# Altium PCB 2015-08-14_11-36-19.PcbDoc
Units mil, origin at the board's own origin, x right, y up, seen from the top; angles counter-clockwise.
Board outline 3100 x 2300 mil, 4 copper layers (Top Layer, MidLayer1, MidLayer2, Bottom Layer); 26 components, 13 nets, 66 pads, 301 vias.
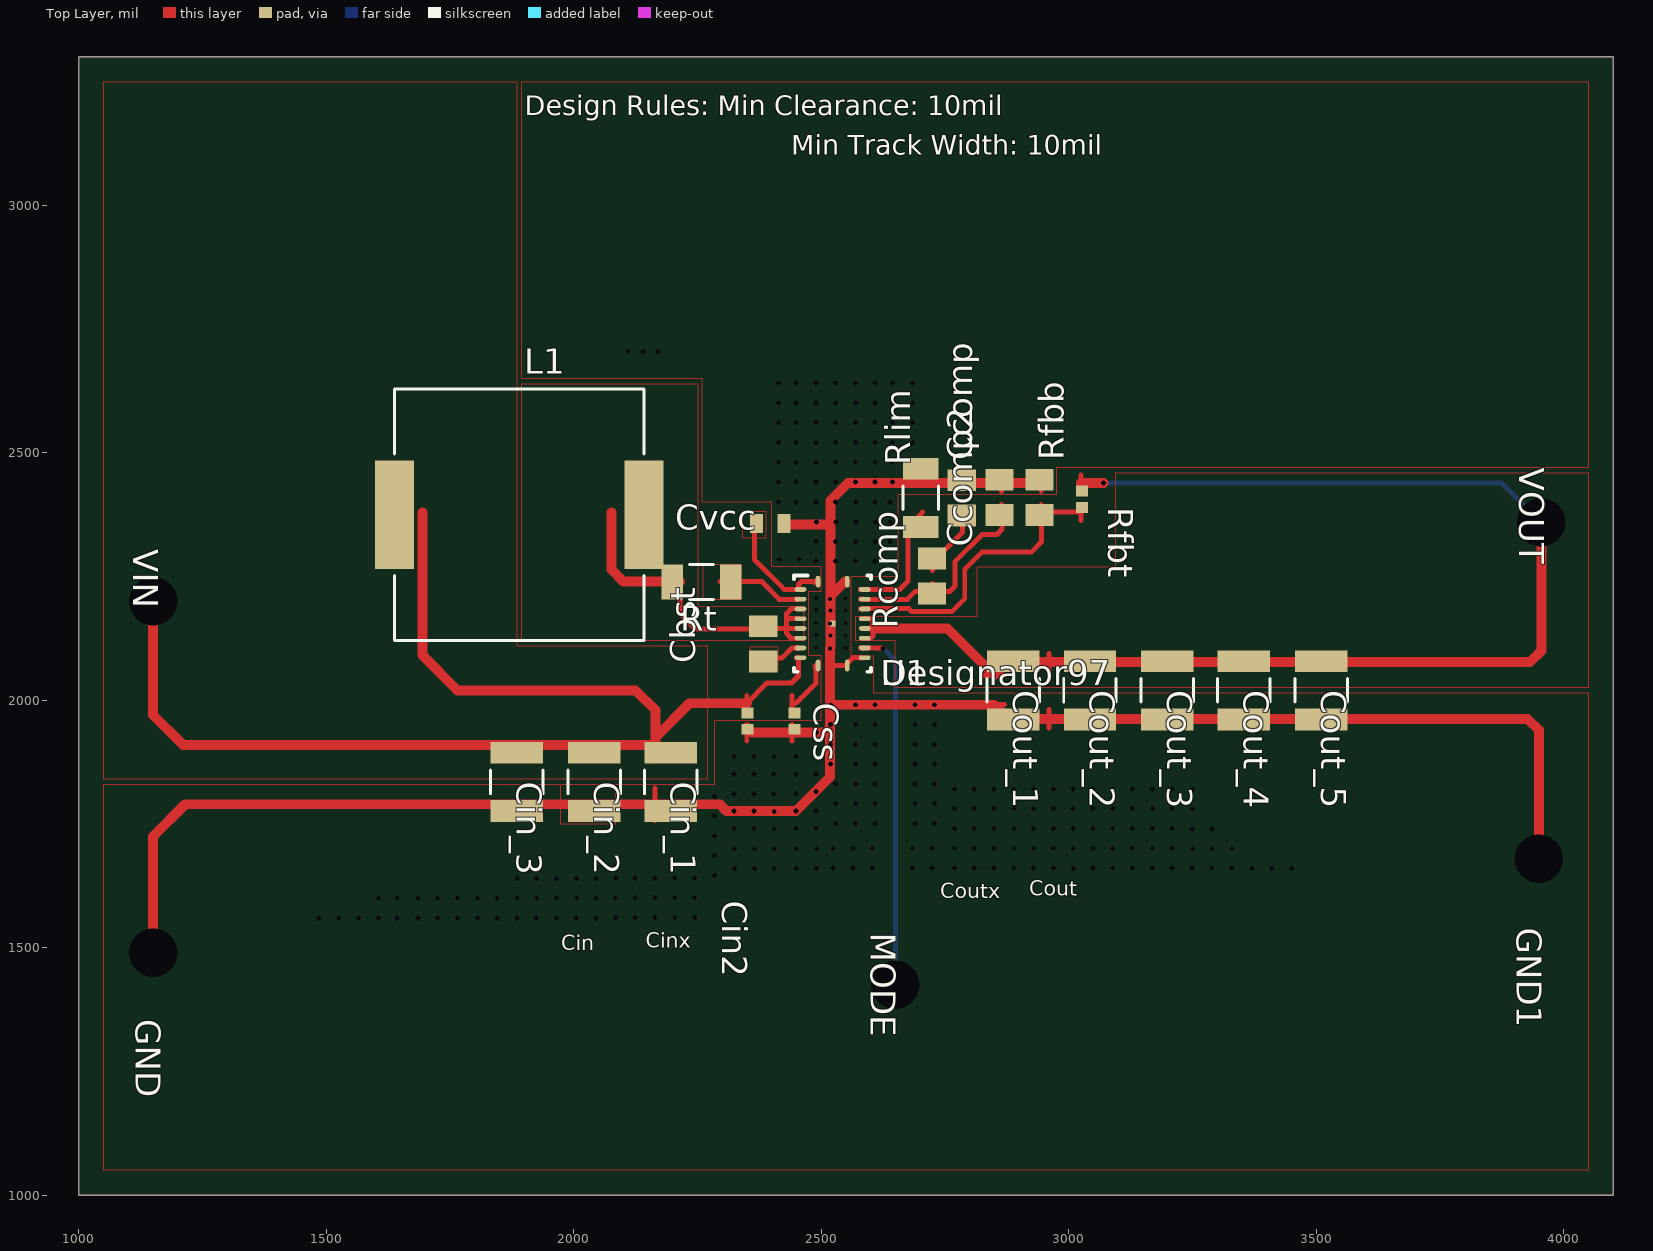
[diagram p0: Top Layer view]
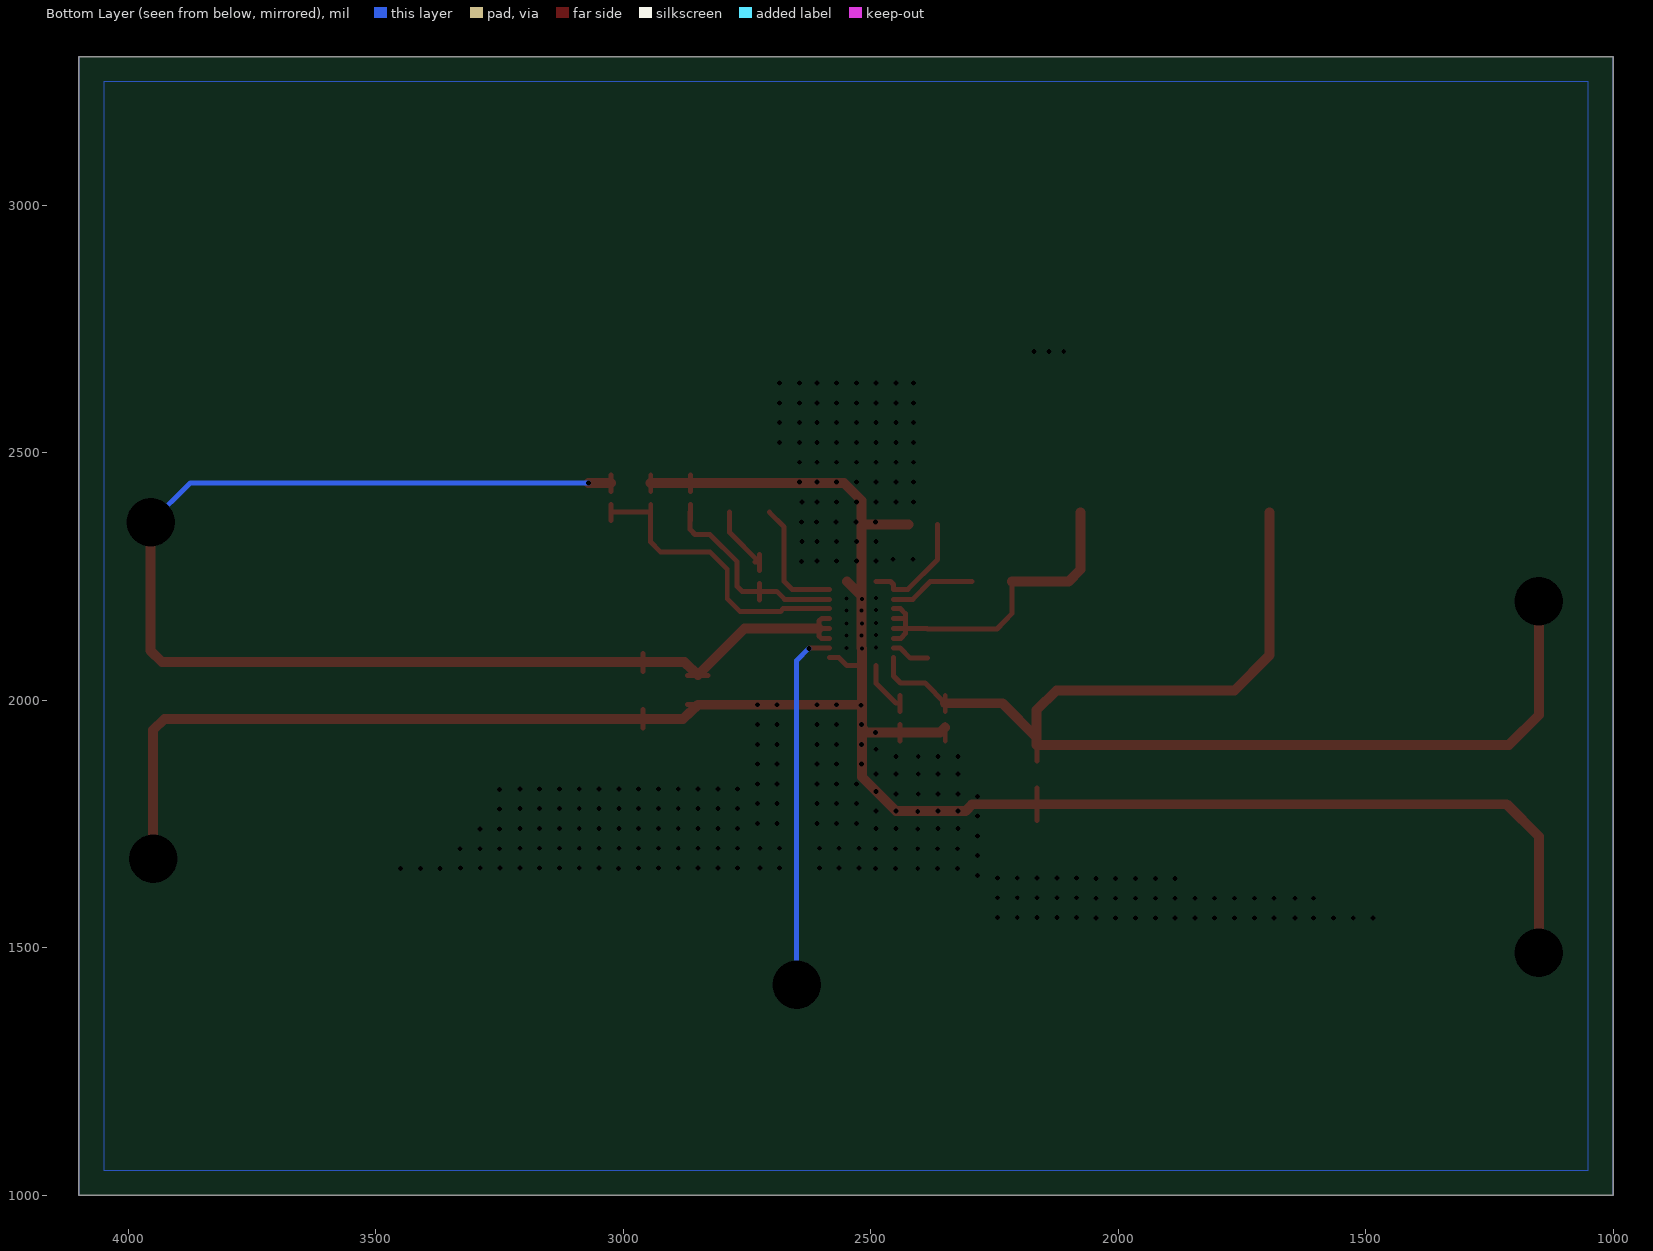
[diagram p1: Bottom Layer view, seen from below]

## Layer stack, top to bottom
Top Layer: signal copper 1.4
Dielectric: core 12.6, FR-4, Dk 4.8
MidLayer1: signal copper 1.4
Dielectric: prepreg 12.6, FR-4, Dk 4.8
MidLayer2: signal copper 1.4
Dielectric: core 12.6, FR-4, Dk 4.8
Bottom Layer: signal copper 1.4

## Board outline
1000,1000 4100,1000 4100,3300 1000,3300

## Design rules (kind name [scope] priority, off if disabled: settings)
PlaneConnect [All] p0: scope1count=1 scope1_0_kind=Board scope1_0_value=Board scope2count=1 scope2_0_kind=Board scope2_0_value=Board commentlength=0 planeconnectstyle=Direct reliefexpansion=20 reliefentries=4 reliefconductorwidth=10 reliefairgap=10
PlaneConnect [All] p1: planeconnectstyle=Direct reliefexpansion=20 reliefentries=4 reliefconductorwidth=10 reliefairgap=10
PolygonConnect [All] p0: scope1count=1 scope1_0_kind=Board scope1_0_value=Board scope2count=1 scope2_0_kind=Board scope2_0_value=Board commentlength=0 connectstyle=Direct reliefconductorwidth=10 reliefentries=4 polygonreliefangle="90 Angle"
PolygonConnect [All] p1: connectstyle=Direct reliefconductorwidth=10 reliefentries=4 polygonreliefangle="90 Angle"

## Components (designator, comment, footprint, x,y, rotation, side; value= is the part's Value field where it differs from the comment)
Cbst "" 0805 2383,2114 r90 top
Ccomp "" 0805 2784,2409 r90 top
Ccomp2 "" 0805 2860,2410 r90 top
Cin2 "" 0402 2351,1958 r270 top
Cin_1 "" 1210 2196,1835 r270 top
Cin_2 "" 1210 2041,1835 r270 top
Cin_3 "" 1210 1885,1835 r270 top
Cout_1 "" 1210 2888,2020 r270 top
Cout_2 "" 1210 3043,2020 r270 top
Cout_3 "" 1210 3199,2020 r270 top
Cout_4 "" 1210 3354,2020 r270 top
Cout_5 "" 1210 3510,2020 r270 top
Css "" 0402 2446,1958 r270 top
Cvcc "" 1608 2397,2357 r0 top
GND "" TP-1502 1149,1490 r270 top
GND1 "" TP-1502 3948,1679 r270 top
L1 "" ETQP 1890,2375 r0 top
MODE "" TP-1502 2649,1425 r270 top
Rcomp "" 0805 2724,2251 r90 top
Rfbb "" 0805 2941,2410 r90 top
Rfbt "" 0402 3027,2406 r270 top
Rlim "" 1206 2701,2409 r90 top
Rt "" 1206 2258,2239 r0 top
U1 "" RHL0020A 2523,2155 r0 top
VIN "" TP-1502 1149,2198 r270 top
VOUT "" TP-1502 3953,2358 r270 top

## Footprints (in the part's own frame and the unit in brackets; to place one, negate y for a bottom-side part, rotate by r counter-clockwise, add the part's x,y. Pads: shape width x height; smd on the part's side, far side on the other; paste and mask are expansions set on the pad)
0402 [mil]
  rect 22x24 smd: 1(-16.5,0) 2(16.5,0)
0805 [mil]
  rect 44x57 smd: 1(-35.5,0) 2(35.5,0)
1206 [mil]
  rect 44x71 smd: 1(-59,0) 2(59,0)
  silkscreen extent -24,-36 24,36
1210 [mil]
  rect 44x106 smd: 1(-59,0) 2(59,0)
  silkscreen extent -24,-53 24,53
1608 [mil]
  rect 26x38 smd: 1(-27.5,0) 2(27.5,0)
ETQP [mil]
  rect 79x220 smd: 1(-252,0) 2(252,0)
  silkscreen extent -252,-254 252,254
RHL0020A [mm]
  oval 0.24x0.6 smd: 1(-0.75,2.15) 10(-0.75,-2.15) 11(0.75,-2.15) 20(0.75,2.15)
  oval 0.6x0.24 smd: 2(-1.65,1.75) 3(-1.65,1.25) 4(-1.65,0.75) 5(-1.65,0.25) 6(-1.65,-0.25) 7(-1.65,-0.75) 8(-1.65,-1.25) 9(-1.65,-1.75) 12(1.65,-1.75) 13(1.65,-1.25) 14(1.65,-0.75) 15(1.65,-0.25) 16(1.65,0.25) 17(1.65,0.75) 18(1.65,1.25) 19(1.65,1.75)
  rect 0.3x0.3 smd: 21(0,0)
  silkscreen extent -1.98,-2.47 1.98,2.47
TP-1502 [mil]
  round 0 hole 32: 1(0,0)

## Via types
v1: diameter 0, hole 10, Top Layer to Bottom Layer, 281 vias
v2: diameter 0, hole 8, Top Layer to Bottom Layer, 15 vias
v3: diameter 0, hole 98, Top Layer to Bottom Layer, 5 vias

## Nets (pads, with @x,y where several pads share a name; then routed paths per layer and width w, separated by ;. In a path a pad name is that pad's centre, name@x,y a point inside that pad or via, vN(x,y) a via of type N, cw(c..) or ccw(c..) an arc to the next point about the centre after c; other vN are vias at no path point)
0: Ccomp2.2 Ccomp.2 Cin2.2 Cin_1.2 Cin_2.2 Cin_3.2 Cout_1.2 Cout_2.2 Cout_3.2 Cout_4.2 Cout_5.2 Css.2 Cvcc.2 GND1.1 GND.1 Rfbb.2 Rlim.2 U1.11 U1.12 U1.20 U1.21 | length 5042.3
  Top Layer w10: Cin_1.2@2164,1757 2164,1823 ; 2349.5,1918 Cin2.2@2349.5,1951 ; 2440.5,1918 Css.2@2440.5,1951 ; 2518,2070 2519,2070 2548,2070 2564,2086 U1.12@2583,2086 ; U1.21@2518.5,2153 U1.21@2518.5,2156 ; 2829,1991.5 2870,1991.5 ; 2864.5,2422 Ccomp2.2@2864.5,2455 ; 2944.5,2422 Rfbb.2@2944.5,2455 ; 2960,1944 2960,1981
  Top Layer w20: v3(1150,1490) 1150,1725 1215,1790 2030,1790 2165,1790 2295,1790 2308,1776 v1(2324,1776) v1(2364,1776) v1(2449,1776) 2518,1845 2518,1945 ; Cin2.2@2350,1945 2360,1935 2441,1935 2509,1935 2518,1945 ; Cvcc.2@2424,2355 2519,2355 ; U1.20@2548,2240 2519,2211 ; Rfbb.2@2945,2439 2865,2439 2785,2439 2705,2439 2554,2439 2519,2404 2519,2355 ; v3(3950,1680) 3950,1940 3927,1962 2960,1962 2879,1962 2849,1991 2521,1991 2518,1995 ; 2518,1945 2518,1995 ; 2518,1995 2518,2070 v2(2518,2105) 2519,2106 v2(2519,2131) v2(2519,2181) 2519,2211 ; 2519,2211 2519,2355
  other v1: 1485,1560 1525,1560 1565,1560 1605,1560 1643,1560 1685,1560 1725,1560 1765,1560 1805,1560 1845,1560 1885,1560 1925,1560 1965,1560 2005,1560 2045,1560 2084,1561 2124,1561 2164,1561 2204,1561 2244,1561 1605,1600 1643,1600 1685,1600 1725,1600 1765,1600 1805,1600 1845,1600 1885,1600 1925,1600 1965,1600 2005,1600 2045,1600 2084,1601 2124,1601 2164,1601 2204,1601 2244,1601 1885,1640 1925,1640 1965,1640 2005,1640 2045,1640 2084,1641 2124,1641 2164,1641 2204,1641 2244,1641 2284,1646 2325,1660 2365,1660 2405,1660 2450,1660 2490,1660 3010,1660 3370,1660 3410,1660 3450,1660 2524,1661 2564,1661 2604,1661 2684,1661 2724,1661 2769,1661 2809,1661 2849,1661 2889,1661 2929,1661 2969,1661 3049,1661 3089,1661 3129,1661 3169,1661 3209,1661 3249,1661 3289,1661 3329,1661 2284,1686 2325,1700 2365,1700 2405,1700 2450,1700 2490,1700 3250,1700 3290,1700 3330,1700 2524,1701 2564,1701 2604,1701 2684,1701 2724,1701 2769,1701 2809,1701 2849,1701 2889,1701 2929,1701 2969,1701 3009,1701 3049,1701 3089,1701 3129,1701 3169,1701 3209,1701 2284,1726 2405,1740 3250,1740 3290,1740 2324,1741 2364,1741 2449,1741 2489,1741 2769,1741 2809,1741 2849,1741 2889,1741 2929,1741 2969,1741 3009,1741 3049,1741 3089,1741 3129,1741 3169,1741 3209,1741 2529,1751 2569,1751 2609,1751 2689,1751 2729,1751 2284,1766 2405,1775 2489,1776 3250,1780 2769,1781 2809,1781 2849,1781 2889,1781 2929,1781 2969,1781 3009,1781 3049,1781 3089,1781 3129,1781 3169,1781 3209,1781 2529,1791 2569,1791 2609,1791 2689,1791 2729,1791 2284,1806 2324,1811 2364,1811 2404,1811 2449,1811 2489,1816 3250,1820 2769,1821 2809,1821 2849,1821 2889,1821 2929,1821 2969,1821 3009,1821 3049,1821 3089,1821 3129,1821 3169,1821 3209,1821 2529,1831 2569,1831 2609,1831 2689,1831 2729,1831 2324,1851 2364,1851 2404,1851 2449,1851 2489,1851 2519,1871 2569,1871 2609,1871 2689,1871 2729,1871 2324,1886 2364,1886 2404,1886 2449,1886 2489,1901 2519,1911 2569,1911 2609,1911 2689,1911 2729,1911 2490,1935 2519,1951 2569,1951 2609,1951 2689,1951 2729,1951 2520,1990 2569,1991 2609,1991 2689,1991 2729,1991 2640,2280 2489,2281 2529,2281 2569,2281 2609,2281 2415,2285 2455,2285 2489,2321 2529,2321 2569,2321 2609,2321 2639,2321 2490,2360 2530,2360 2570,2360 2610,2360 2640,2360 2414,2401 2449,2401 2489,2401 2529,2401 2569,2401 2609,2401 2639,2401 2414,2441 2449,2441 2489,2441 2529,2441 2569,2441 2609,2441 2644,2441 2414,2481 2449,2481 2489,2481 2529,2481 2569,2481 2609,2481 2644,2481 2414,2521 2449,2521 2489,2521 2529,2521 2569,2521 2609,2521 2644,2521 2684,2521 2414,2561 2449,2561 2489,2561 2529,2561 2569,2561 2609,2561 2644,2561 2684,2561 2414,2601 2449,2601 2489,2601 2529,2601 2569,2601 2609,2601 2644,2601 2684,2601 2414,2641 2449,2641 2489,2641 2529,2641 2569,2641 2609,2641 2644,2641 2684,2641 2110,2705 2140,2705 2170,2705
  other v2: 2549,2106 2489,2107 2549,2131 2489,2132 2518,2155 2549,2155 2489,2156 2549,2181 2489,2182 2518,2205 2549,2206 2489,2207
1: Cin2.1 Cin_1.1 Cin_2.1 Cin_3.1 L1.1 U1.9 VIN.1 | length 2637.5
  Top Layer w10: Cin_1.1@2164,1877 2164,1943 ; Cin2.1@2349.5,1977 2349.5,2010 ; 2350,1994 2390,2035 2440,2035 2454,2049 U1.9@2454,2086
  Top Layer w20: v3(1150,2200) 1150,1970 1210,1910 Cin_1.1@2165,1910 ; 1694,2380 1694,2091 1765,2020 2125,2020 2165,1980 Cin_1.1@2165,1910 ; 2350,1994 2234,1994 2165,1925 Cin_1.1@2165,1910
2: Cvcc.1 U1.1 U1.2 | length 232.3
  Top Layer w10: Cvcc.1@2365,2355 2365,2284 2425,2224 2454,2224 2454,2234 2460,2240 U1.1@2489,2240
3: Ccomp2.1 Rcomp.1 U1.18 | length 470.7
  Top Layer w10: U1.18@2583,2204 2674,2204 2690,2220 2725,2220 2760,2220 2770,2230 2770,2280 2825,2335 2855,2335 2865,2345 Ccomp2.1@2865,2380 ; Rcomp.1@2724.5,2203 Rcomp.1@2724.5,2236 ; Ccomp2.1@2864.5,2363 Ccomp2.1@2864.5,2396
5: Ccomp.1 Rcomp.2 | length 167.9
  Top Layer w10: 2724.5,2262 Rcomp.2@2724.5,2295 ; Rcomp.2@2734,2279 2725,2279 2785,2339 Ccomp.1@2785,2380
7: Rfbb.1 Rfbt.2 U1.17 | length 664.4
  Top Layer w10: U1.17@2583,2185 2677,2185 2682,2179 2764,2179 2790,2205 2790,2265 2825,2300 2925,2300 2945,2320 2945,2380 Rfbt.2@3025,2380 ; Rfbb.1@2944.5,2363 Rfbb.1@2944.5,2396 ; 3024.5,2363 Rfbt.2@3024.5,2396
8: Cout_1.1 Cout_2.1 Cout_3.1 Cout_4.1 Cout_5.1 Rfbt.1 U1.14 U1.15 U1.16 VOUT.1 | length 2842.3
  Top Layer w10: U1.14@2583,2125 2600,2125 2605,2130 2605,2145 ; U1.15@2583,2145 2605,2145 ; U1.16@2583,2165 2599,2165 2605,2160 2605,2145 ; 2829,2050.5 2870,2050.5 ; 2960,2058 2960,2095 ; Rfbt.1@3024.5,2422 3024.5,2455
  Top Layer w20: 2605,2145 2755,2145 2849,2051 2876,2077 2960,2077 3932,2077 3955,2100 v3(3955,2360) ; 3025,2439 v1(3070,2439)
  Bottom Layer w10: v1(3070,2439) 3875,2439 v3(3955,2360)
9: Cbst.2 L1.2 Rt.1 U1.4 U1.5 U1.6 U1.7 | length 703.1
  Top Layer w10: Rt.1@2215,2240 2215,2175 2245,2144 2385,2144 2386,2145 2430,2145 ; U1.7@2454,2125 2439,2125 2430,2135 2430,2145 ; U1.6@2454,2145 2430,2145 ; U1.5@2454,2165 2430,2165 ; U1.4@2454,2185 2440,2185 2430,2175 2430,2165 ; 2430,2145 2430,2165
  Top Layer w20: 2076,2380 2076,2264 2100,2240 Rt.1@2215,2240
11: Rlim.1 U1.19 | length 251.1
  Top Layer w10: U1.19@2583,2224 2659,2224 2675,2240 2675,2350 2705,2380
14: Css.1 U1.10 | length 133.6
  Top Layer w10: Css.1@2440.5,1977 2440.5,2010 ; 2441,1994 2449,1994 2489,2034 U1.10@2489,2070
15: Cbst.1 U1.8 | length 77.7
  Top Layer w10: Cbst.1@2385,2085 2420,2085 2441,2106 U1.8@2454,2106
16: Rt.2 U1.3 | length 174.2
  Top Layer w10: Rt.2@2295,2240 2380,2240 2415,2204 U1.3@2454,2204
22: MODE.1 U1.13 | length 732.6
  Top Layer w10: U1.13@2583,2106 2623,2106 v1(2625,2105)
  Bottom Layer w10: v1(2625,2105) 2650,2080 v3(2650,1425)

## Polygon pours and split planes (outlines as drawn)
2 on Top Layer " " (solid, pour order 0): 2341,2327 2341,2382 2388,2382 2388,2327
2 on Top Layer " " (solid, pour order 1): 2484,2232 2484,2242 2493,2242 2493,2232
11 on Top Layer " " (solid, pour order 2): 2576,2219 2576,2228 2586,2228 2586,2219
3 on Top Layer " " (solid, pour order 3): 2576,2200 2576,2209 2586,2209 2586,2200
7 on Top Layer " " (solid, pour order 4): 2576,2180 2576,2189 2586,2189 2586,2180
22 on Top Layer " " (solid, pour order 5): 2576,2101 2576,2110 2586,2110 2586,2101
14 on Top Layer " " (solid, pour order 6): 2484,2064 2484,2073 2493,2073 2493,2064
1 on Top Layer " " (solid, pour order 7): 2446,2081 2446,2090 2456,2090 2456,2081
15 on Top Layer " " (solid, pour order 8): 2446,2101 2446,2110 2456,2110 2456,2101
16 on Top Layer " " (solid, pour order 9): 2446,2200 2446,2209 2456,2209 2456,2200
2 on Top Layer " " (solid, pour order 10): 2446,2219 2446,2228 2456,2228 2456,2219
16 on Top Layer " " (solid, pour order 11): 2262,2203 2262,2275 2337,2275 2337,2203
15 on Top Layer " " (solid, pour order 12): 2357,2061 2357,2108 2412,2108 2412,2061
1 on Top Layer " " (solid, pour order 13): 1885,3250 1885,2110 2270,2110 2270,1840 1050,1840 1050,3250
9 on Top Layer " " (solid, pour order 14): 1895,2120 1895,2640 2250,2640 2250,2190 2465,2190 2465,2120
8 on Top Layer " " (solid, pour order 15): 2570,2120 2570,2170 2815,2170 2815,2270 3095,2270 3095,2460 4050,2460 4050,2025 2650,2025 2650,2120
0 on Top Layer " " (solid, pour order 16): 2576,2081 2576,2090 2586,2090 2586,2081
0 on Top Layer " " (solid, pour order 17): 1974,1750 1974,1830 2084,1830 2084,1750
0 on Top Layer " " (solid, pour order 19): 2285,1960 2500,1960 2500,2090 2475,2090 2475,2220 2500,2220 2500,2270 2400,2270 2400,2400 2260,2400 2260,2650 1895,2650 1895,3250 4050,3250 4050,2470 2975,2470 2975,2415 2655,2415 2655,2250 2560,2250 2560,2090 2605,2090 2605,2015 4050,2015 4050,1050 1050,1050 1050,1830 2285,1830
0 on Bottom Layer " " (solid, pour order 18): 1050,1050 1050,3250 4050,3250 4050,1050

## Other copper
Multi-Layer:
  the board outline again, w1

## Silkscreen, mask and mechanical layers (free items; w line width, h text height)
Top Overlay:
  text "Design Rules: Min Clearance: 10mil" at 1901,3182 h40
  text "Min Track Width: 10mil" at 2439,3102 h40
  text "Cout" at 2920,1605 h30
  text "Coutx" at 2740,1600 h30
  text "Cinx" at 2145,1500 h30
  text "Cin" at 1975,1495 h30

## Text inside footprints (layer, text, board x,y; h text height)
U1: Top Overlay "Designator97" at 2620,2030 h50